# Altium PCB buffer.PcbDoc
Units mil, origin at the board's own origin, x right, y up, seen from the top; angles counter-clockwise.
Board outline 6000 x 4000 mil, 2 copper layers (Top Layer, Bottom Layer); 7 components, 5 nets, 20 pads, 0 vias.
Unrouted connection lines stored in the file: 9.
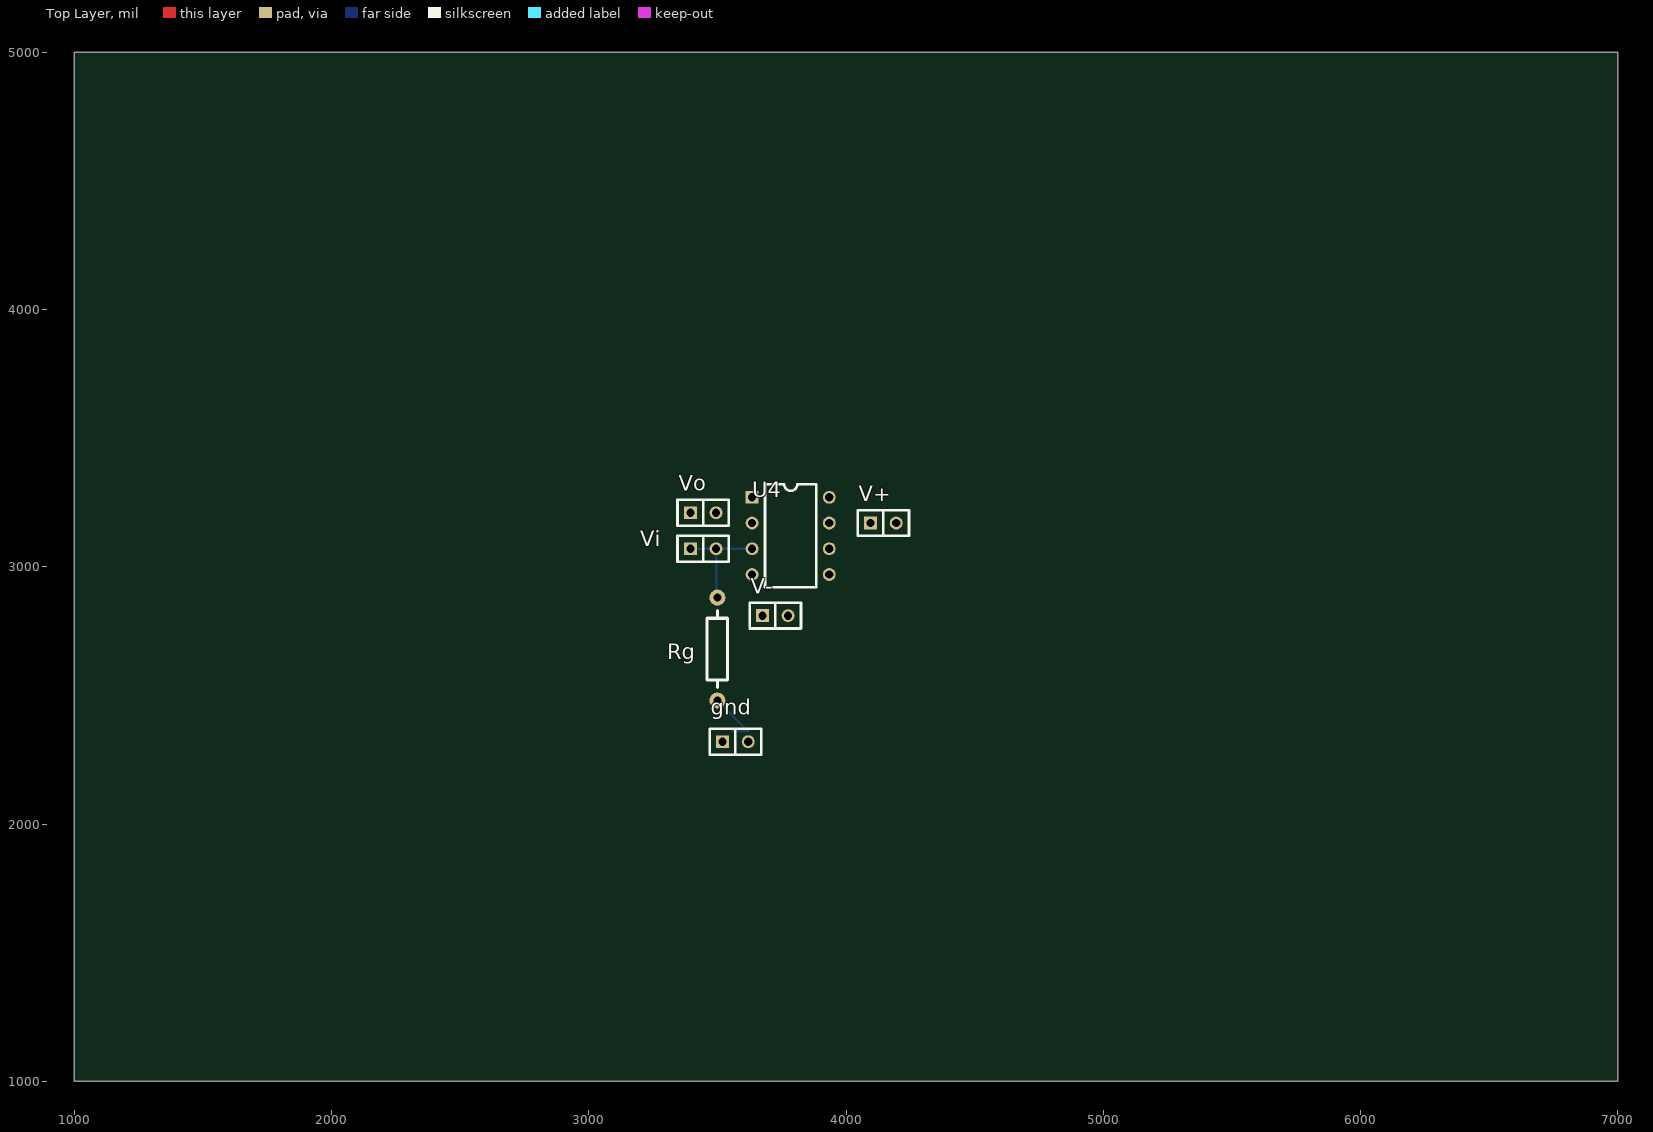
[diagram p0: Top Layer view]
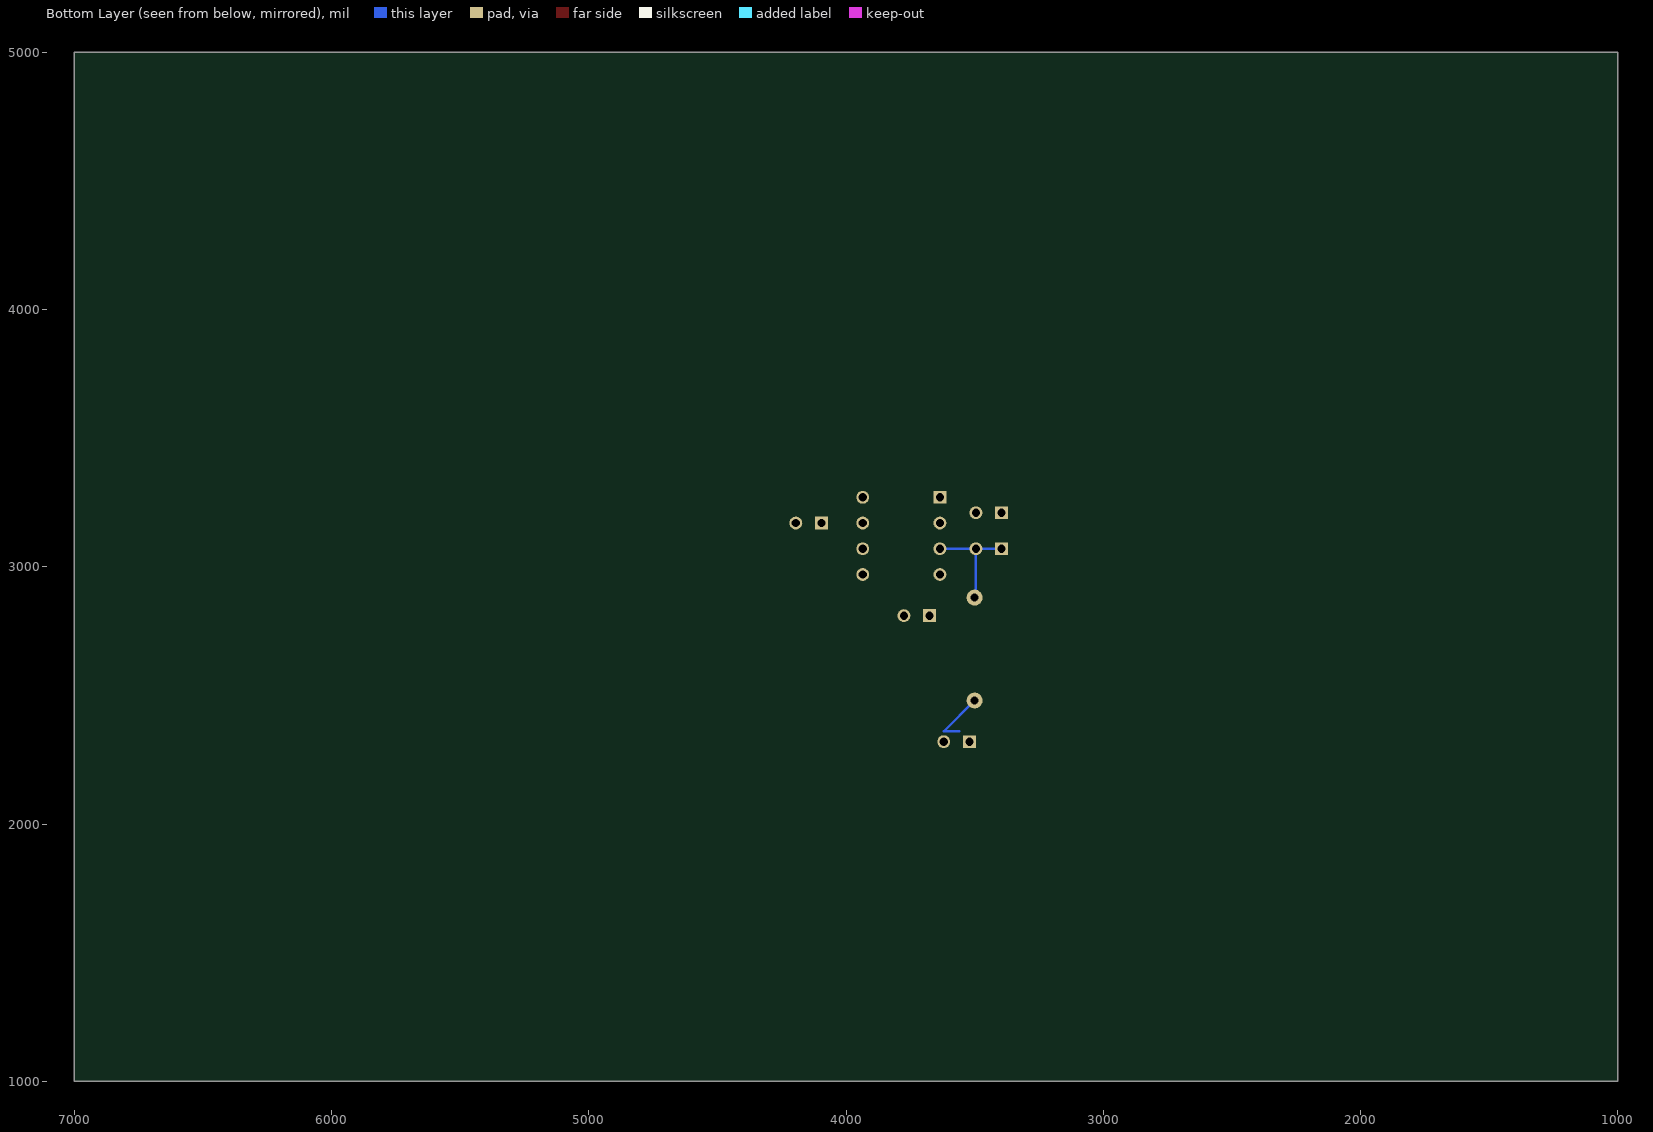
[diagram p1: Bottom Layer view, seen from below]

## Layer stack, top to bottom
Top Layer: signal copper 1.4
Dielectric: dielectric 12.6, FR-4, Dk 4.8
Bottom Layer: signal copper 1.4

## Board outline
1000,1000 7000,1000 7000,5000 1000,5000

## Design rules (kind name [scope] priority, off if disabled: settings)
Clearance [All] p1: gap=10
PolygonConnect [All] p1: connectstyle=Relief reliefconductorwidth=10 reliefentries=4 polygonreliefangle="90 Angle"
RoutingVias [All] p1: holewidth=28 width=50 viastyle="Through Hole" minholewidth=28 minwidth=50 maxholewidth=28 maxwidth=50
SilkscreenOverComponentPads [All] p1: minsilkscreentomaskgap=10
SolderMaskExpansion [All] p1: expansion=4
TestPointUsage [All] p1: valid=0 allowmultiple=FALSE
Testpoint [All] p1: side=15 testpointundercomponent=TRUE minsize=40 maxsize=100 preferedsize=60 minholesize=0 maxholesize=40 preferedholesize=32 testpointgrid=1 style=1023 order=0-112345678
Width [All] p1: maxlimit=10 minlimit=10 preferedwidth=10
23 further rules are at their usual default settings.

## Components (designator, comment, footprint, x,y, rotation, side; value= is the part's Value field where it differs from the comment)
gnd "Header 2" SIP2 3520,2320 r0 top
Rg "10k" AXIAL0.4 3500,2480 r90 top
U4 "opa2727" DIP8 3635,3270 r0 top
V+ "Header 2" SIP2 4095,3170 r0 top
V- "Header 2" SIP2 3675,2810 r0 top
Vi "Header 2" SIP2 3395,3070 r0 top
Vo "Header 2" SIP2 3395,3210 r0 top

## Footprints (in the part's own frame and the unit in brackets; to place one, negate y for a bottom-side part, rotate by r counter-clockwise, add the part's x,y. Pads: shape width x height; smd on the part's side, far side on the other; paste and mask are expansions set on the pad)
AXIAL0.4 [mil]
  round 62 hole 32: 1(0,0) 2(400,0)
  silkscreen extent 50,-40 350,40
DIP8 [mil]
  rect 50x50 hole 32: 1(0,0)
  round 50 hole 32: 2(0,-100) 3(0,-200) 4(0,-300) 5(300,-300) 6(300,-200) 7(300,-100) 8(300,0)
  silkscreen extent 50,-350 250,50
SIP2 [mil]
  rect 50x50 hole 32: 1(0,0)
  round 50 hole 32: 2(100,0)
  silkscreen extent -50,-50 150,50

## Part data
gnd V+ V- Vi Vo: "Header, 2-Pin"
Rg: library part RES1
U4: library part AD620ANZ

## Nets (pads, with @x,y where several pads share a name; then routed paths per layer and width w, separated by ;. In a path a pad name is that pad's centre, name@x,y a point inside that pad or via, vN(x,y) a via of type N, cw(c..) or ccw(c..) an arc to the next point about the centre after c; other vN are vias at no path point)
Netgnd_1: gnd.1 Rg.1 | length 229.7
  Bottom Layer w10: Rg.1 3620,2360 3560,2360
NetRg_2: Rg.2 U4.3 Vi.1 Vi.2 | length 425
  Bottom Layer w10: Vi.1 Vi.2 ; Rg.2@3495,2885 Vi.2 ; U4.3 Vi.2
NetU4_2: U4.2 U4.6 Vo.1 Vo.2 | length 341.4
  Bottom Layer w10: 44490,41450 44630,41450 44730,41350 44790,41350
NetU4_4: U4.4 V-.1 V-.2
NetU4_7: U4.7 V+.1 V+.2
pads on no net: gnd.2 U4.1 U4.5 U4.8